# Altium PCB 002-09 -- Hall Effect PCBA.PcbDoc
Units mm, origin at the board's own origin, x right, y up, seen from the top; angles counter-clockwise.
Board outline 43.48 x 43.48 mm, 4 copper layers (Top Layer, VCC, GND, Bottom Layer), stack 1.746 mm thick; 12 components, 6 nets, 37 pads, 25 vias.
Unrouted connection lines stored in the file: 1.
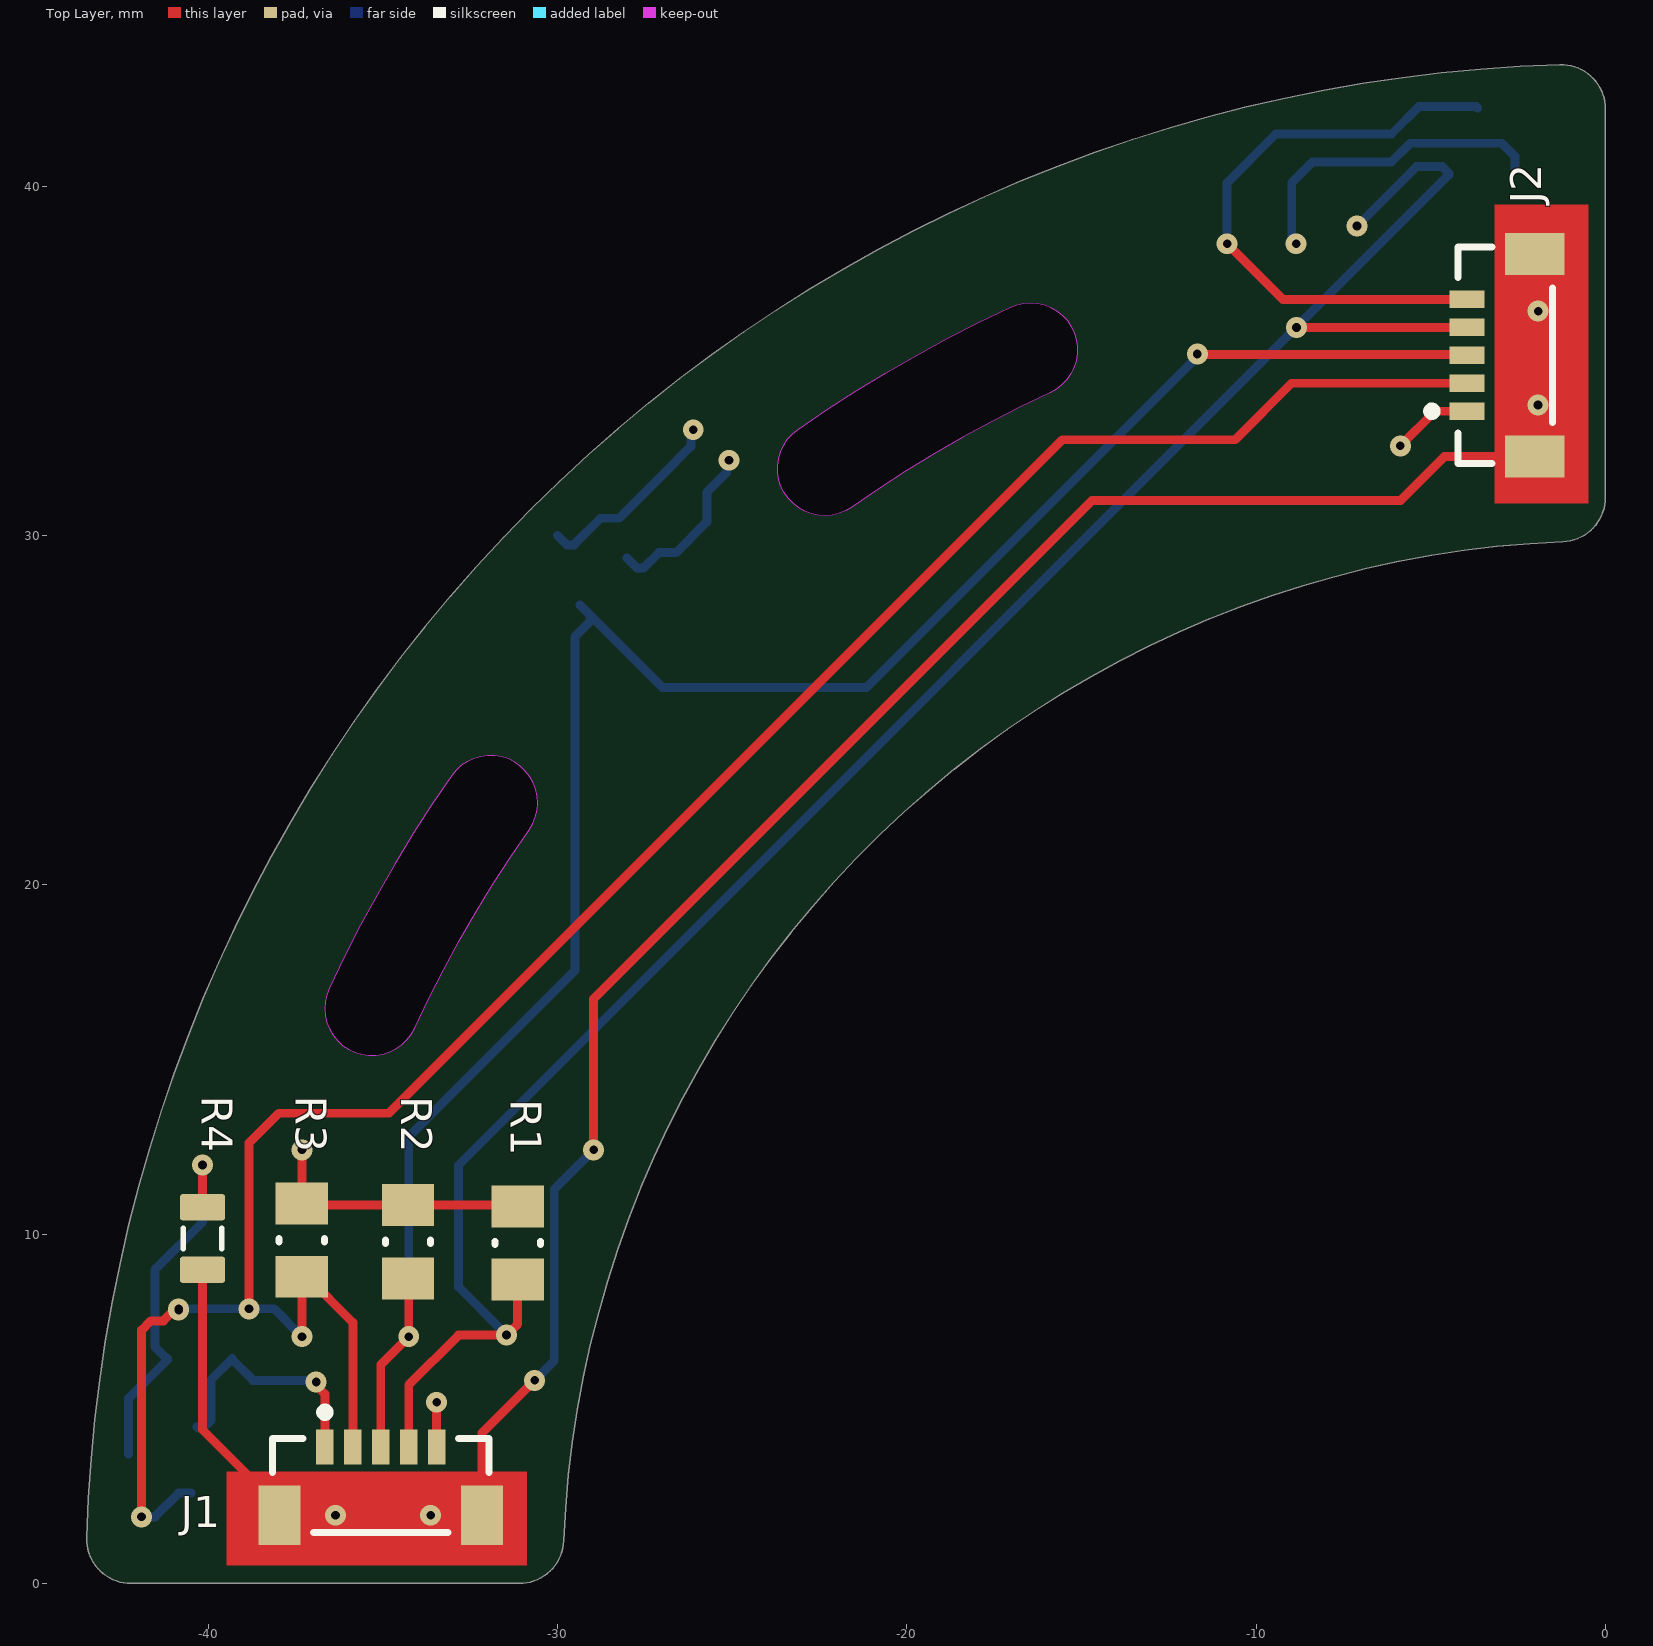
[diagram p0: Top Layer view]
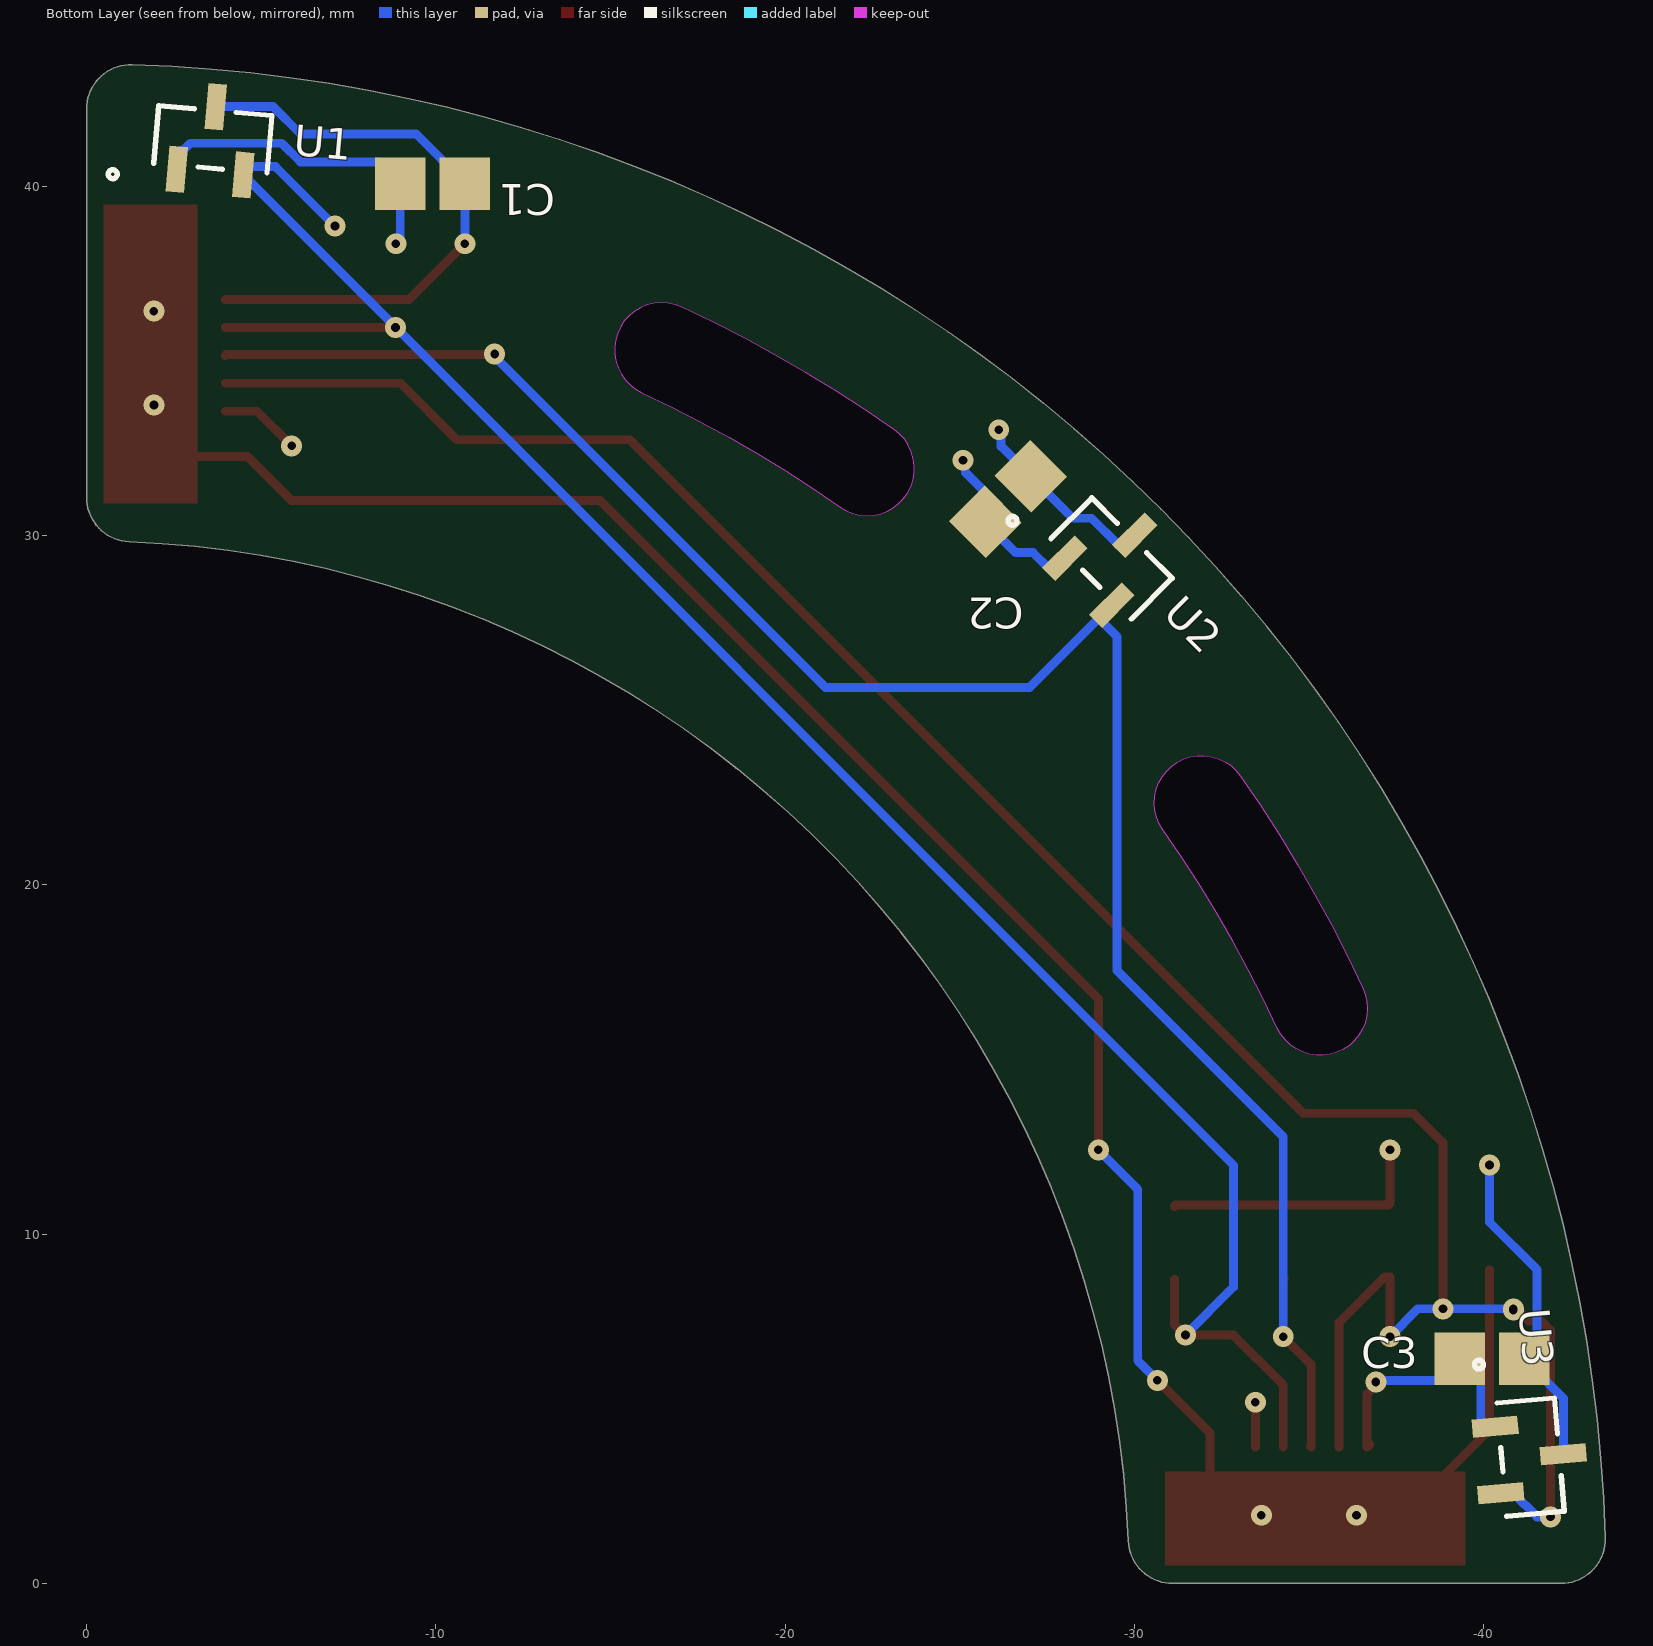
[diagram p1: Bottom Layer view, seen from below]
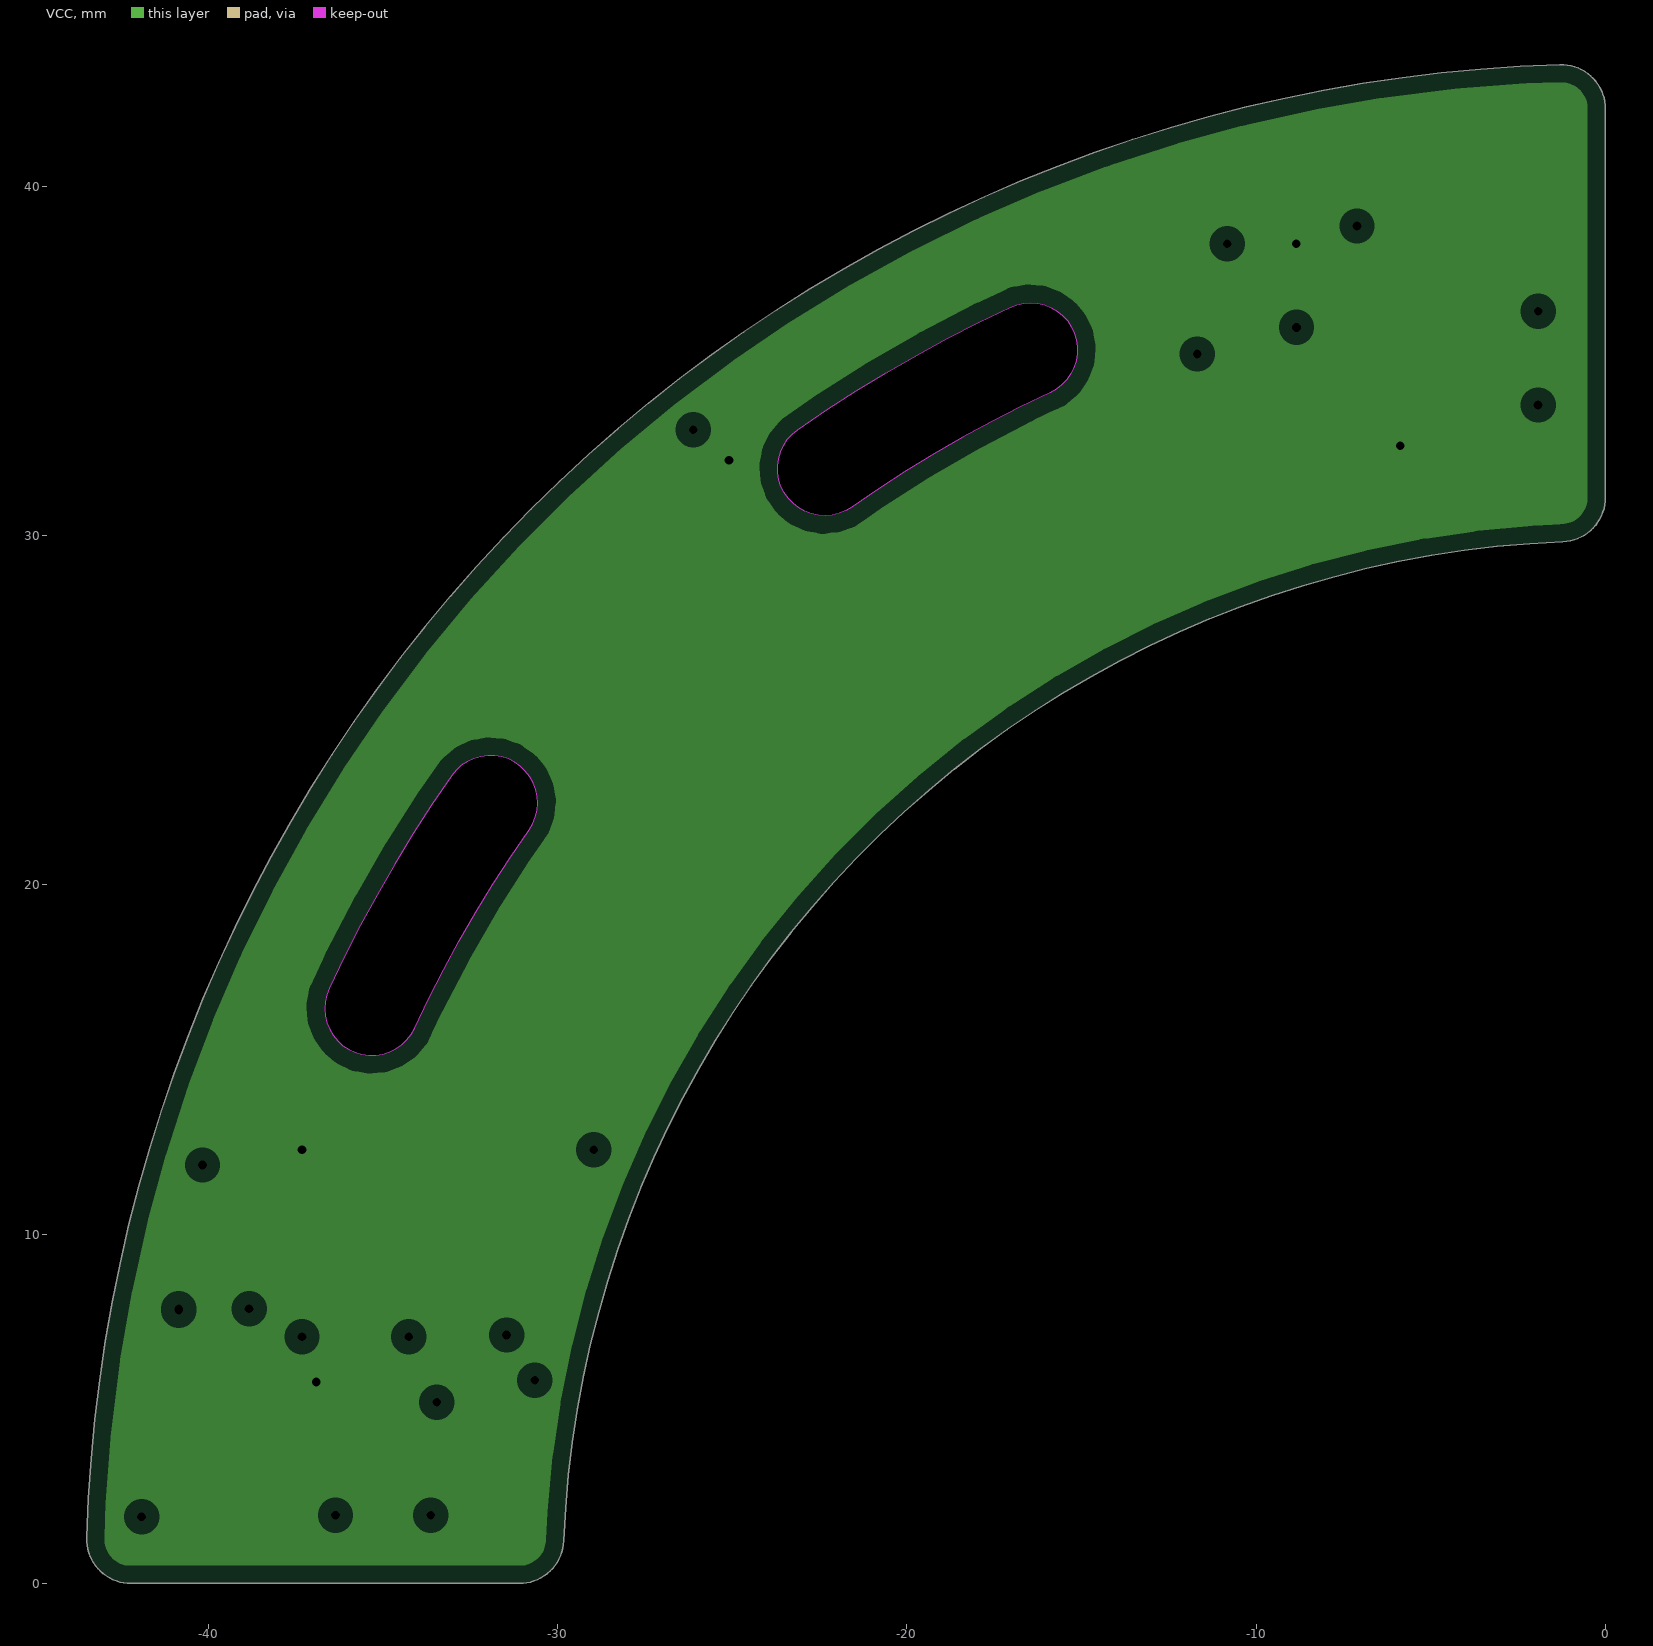
[diagram p2: VCC, clearances drawn from the general rule]
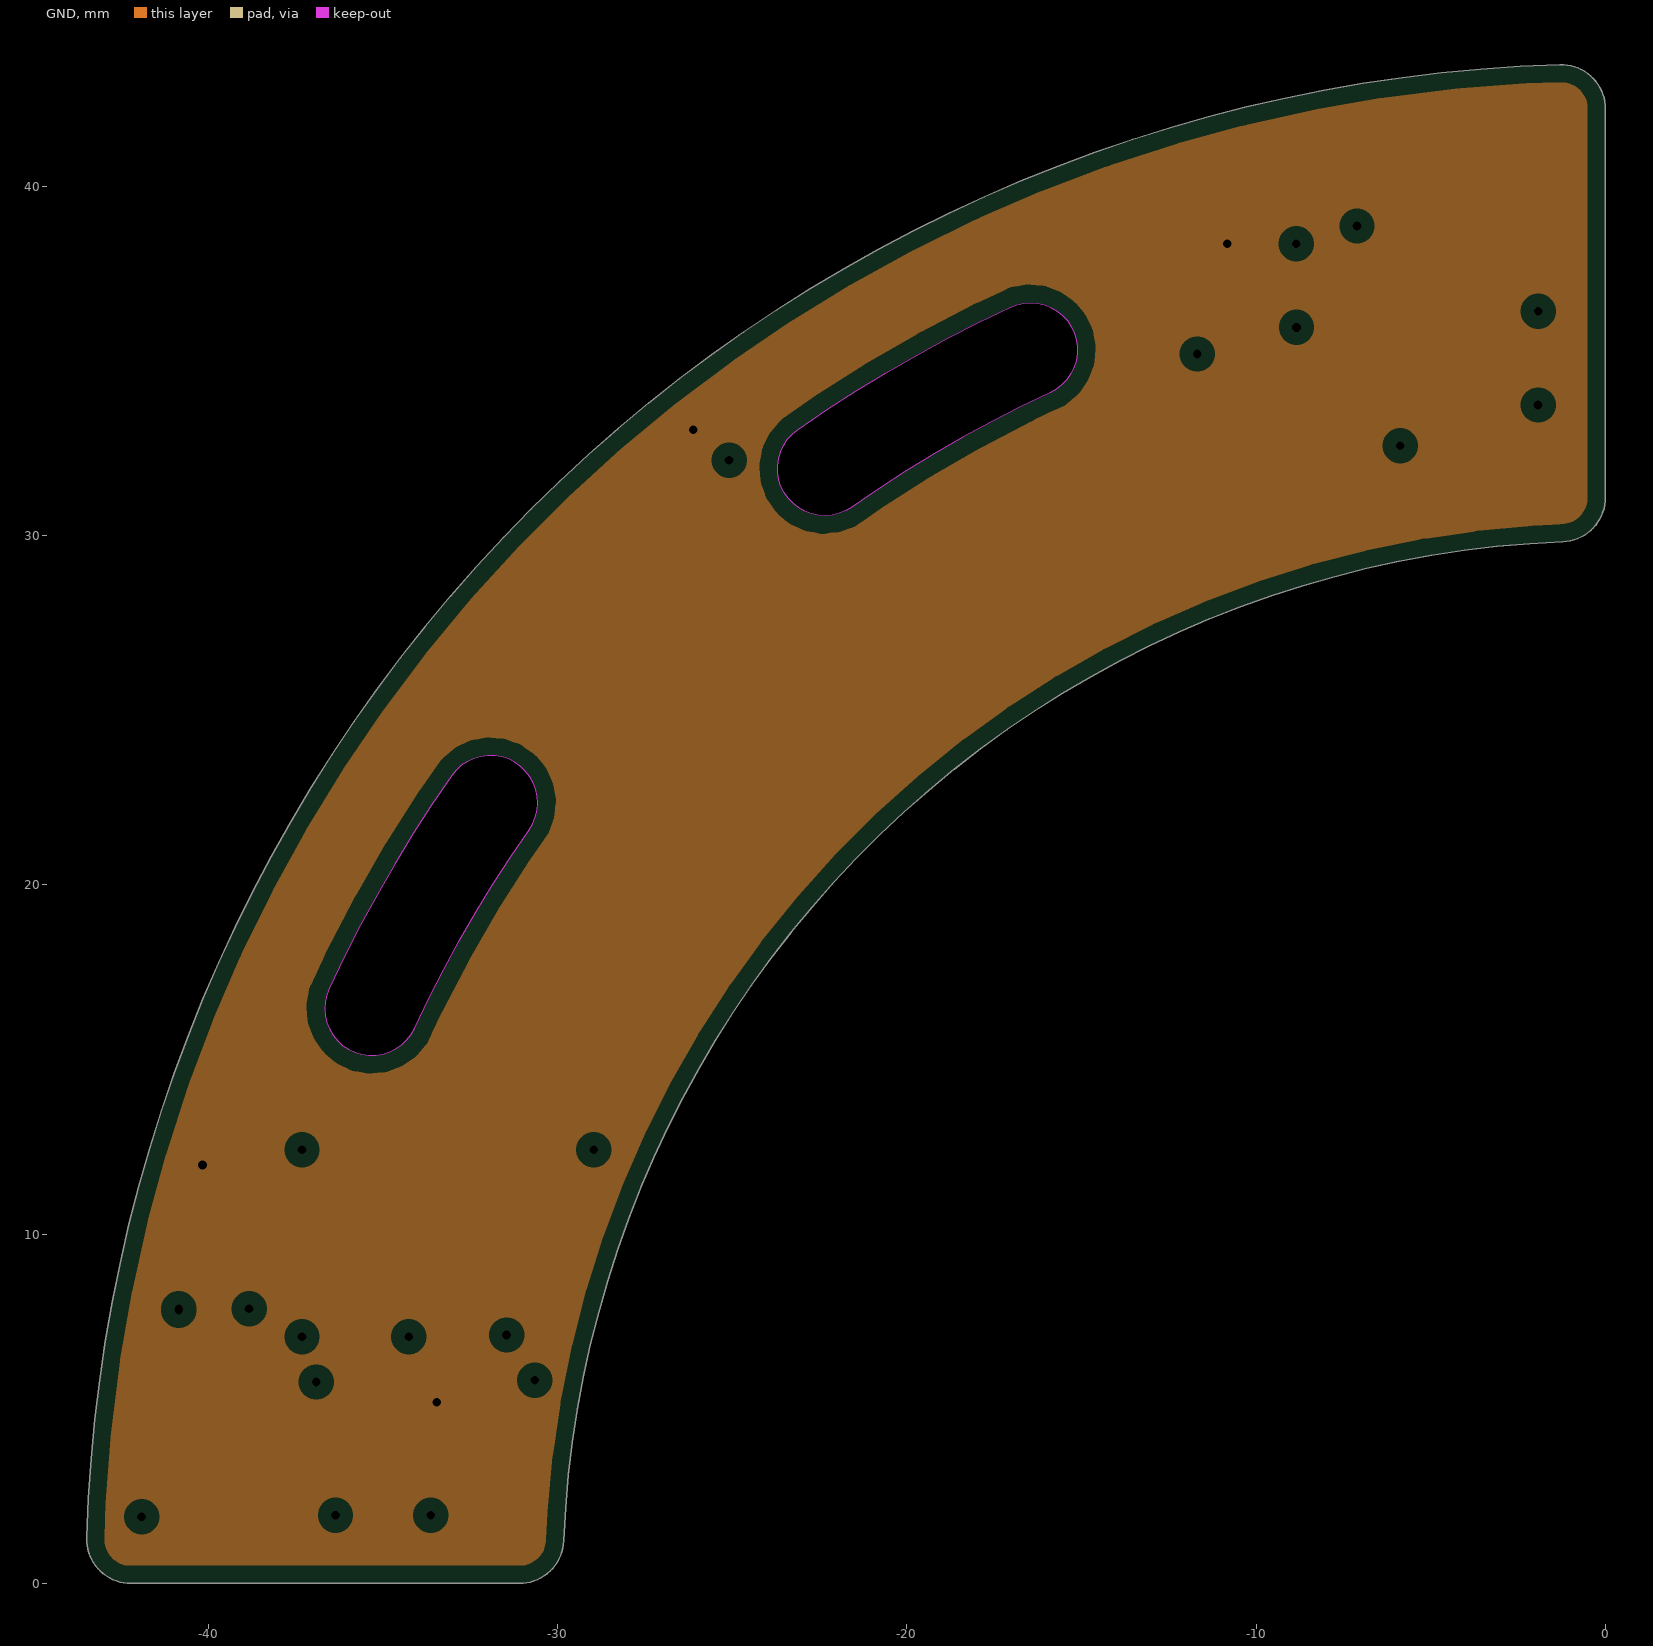
[diagram p3: GND, clearances drawn from the general rule]
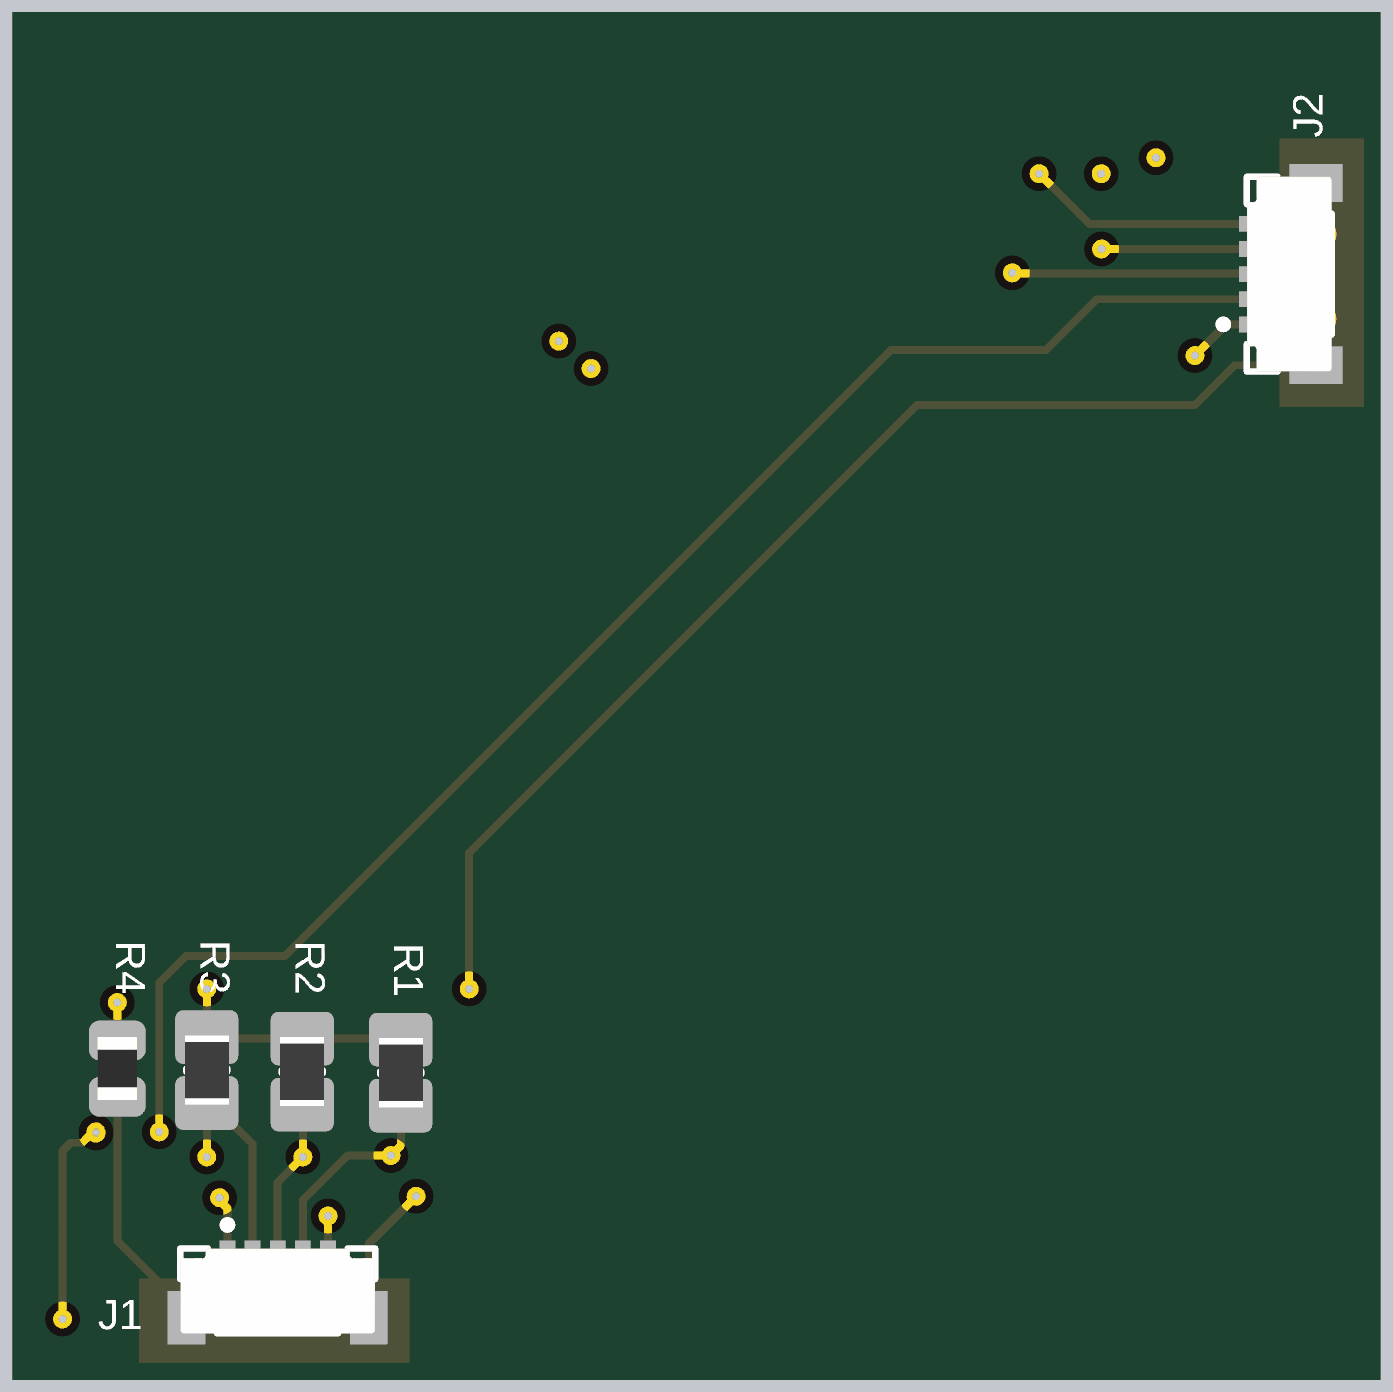
[diagram p4: 3D render of the assembled board from above, using the file's embedded part models]
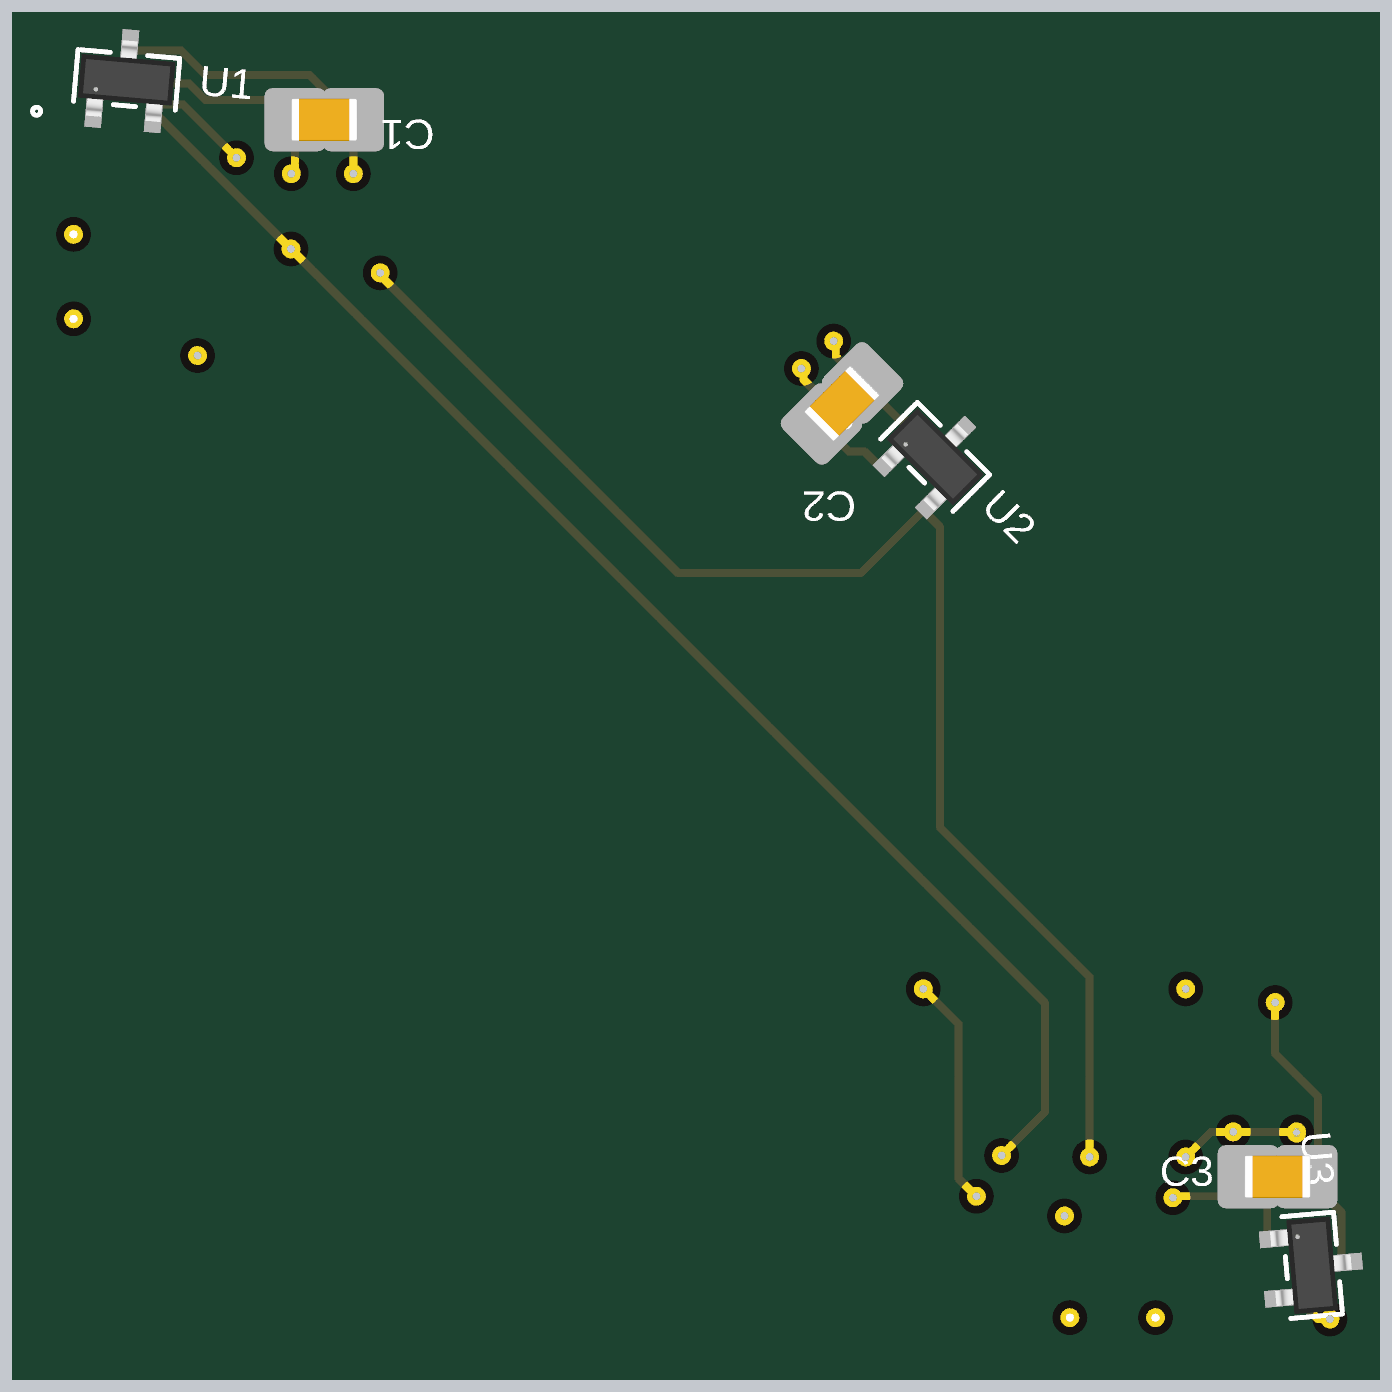
[diagram p5: 3D render of the assembled board from below, using the file's embedded part models]

## Layer stack, top to bottom
Top Solder: solder mask 0.0127, Solder Resist, Dk 3.3
Top Layer: signal copper 0.0178
Dielectric 1: prepreg 0.0711, PP-006, Dk 4.1
VCC: plane copper 0.035, net VCC
Dielectric1: core 1.4986, FR-4, Dk 4.3
GND: plane copper 0.035, net GND
Dielectric 2: prepreg 0.0711, PP-006, Dk 4.1
Bottom Layer: signal copper 0.0178
Bottom Solder: solder mask 0.0127, Solder Resist, Dk 3.3

## Board outline
-42.211,0 -31.094,0 ccw(c-31.094,1.27) -29.825,1.218 cw(c0,0) -1.218,29.825 ccw(c-1.27,31.094) 0,31.094 0,42.211 ccw(c-1.27,42.211) -1.308,43.48 ccw(c0,0) -43.48,1.308 ccw(c-42.211,1.27)
cut-out: -21.575,30.813 cw(c-22.351,31.921) -23.127,33.029 cw(c0,0) -17.04,36.543 cw(c-16.469,35.317) -15.897,34.091 ccw(c0,0)
cut-out: -36.543,17.04 ccw(c-35.317,16.469) -34.091,15.897 cw(c0,0) -30.813,21.575 ccw(c-31.921,22.351) -33.029,23.127 ccw(c0,0)

## Design rules (kind name [scope] priority, off if disabled: settings)
Clearance [All] p1: gap=0.1 ignorepadtopadclearanceinfootprint=FALSE
HoleSize [All] p1: absolutevalues=TRUE maxlimit=7.62 minlimit=0.254 maxpercent=80.000 minpercent=20.000
MinimumAnnularRing [All] p1: minimumring=0.254
PasteMaskExpansion [All] p1: expansion=0.254
PlaneClearance [All] p1: clearance=0.381
PlaneConnect [All] p1: pad.planeconnectstyle=Relief pad.reliefexpansion=0.508 pad.reliefentries=4 pad.reliefconductorwidth=0.254 pad.reliefairgap=0.254 via.planeconnectstyle=Direct via.reliefexpansion=0.508 via.reliefentries=4 via.reliefconductorwidth=0.254 via.reliefairgap=0.254
PolygonConnect [All] p1: connectstyle=Relief reliefconductorwidth=0.254 reliefentries=4 polygonreliefangle="90 Angle" airgapwidth=0.254
RoomDefinition hall_switches [InComponentClass('hall_switches')] p1: confinementstyle=ConfineIn formatcopy=TRUE lockcomponents=FALSE outline -189.975,-113.017 -139.175,-113.017 -139.175,-87.617 -189.975,-87.617
RoutingVias [All] p1: holewidth=0.711 width=1.27 viastyle="Through Hole" minholewidth=0.711 minwidth=1.27 maxholewidth=0.711 maxwidth=1.27
SMDNeckDown [All] p1: percent=100.000
SilkToSolderMaskClearance SilkscreenOverComponentPads [IsPad] p1: minsilkscreentomaskgap=0.254 clearancetoexposedcopper=TRUE
SolderMaskExpansion [All] p1: expansion=0.254 istentingtop=FALSE
Width [All] p1: maxlimit=0.254 minlimit=0.254 preferedwidth=0.254
25 further rules are at their usual default settings.

## Components (designator, comment, footprint, x,y, rotation, side; value= is the part's Value field where it differs from the comment)
C1 "Capacitor 100 nF +/-10% 50 V 0805" CAPC2013X95X50ML10T25 -9.906,40.072 r180 bottom value=100nF
C2 "Capacitor 100 nF +/-10% 50 V 0805" CAPC2013X95X50ML10T25 -26.38,31.044 r135 bottom value=100nF
C3 "Capacitor 100 nF +/-10% 50 V 0805" CAPC2013X95X50ML10T25 -40.239,6.437 r180 bottom value=100nF
J1 "SM05B-SURS-TF(LF)(SN)" FP-SM05B-SURS-TF_LF_SN-MFG -35.06,2.802 r0 top locked
J2 "SM05B-SURS-TF(LF)(SN)" FP-SM05B-SURS-TF_LF_SN-MFG -2.87,35.159 r90 top
R1 "Resistor 10k +/-1% 0805 125 mW" RESC2013X50X35ML15T15 -31.145,9.747 r270 top value=10k
R2 "Resistor 10k +/-1% 0805 125 mW" RESC2013X50X35ML15T15 -34.281,9.78 r270 top value=10k
R3 "Resistor 10k +/-1% 0805 125 mW" RESC2013X50X35ML15T15 -37.318,9.83 r270 top value=10k
R4 "0" RESC0805(2012)_L -40.164,9.88 r90 top
U1 "HAL1502SU-A" SOT-23_TO-236_TDK -3.617,41.342 r185 bottom
U2 "HAL1502SU-A" SOT-23_TO-236_TDK -29.345,29.345 r225 bottom
U3 "HAL1502SU-A" SOT-23_TO-236_TDK -41.342,3.617 r265 bottom

## Footprints (in the part's own frame and the unit in brackets; to place one, negate y for a bottom-side part, rotate by r counter-clockwise, add the part's x,y. Pads: shape width x height; smd on the part's side, far side on the other; paste and mask are expansions set on the pad)
CAPC2013X95X50ML10T25 [mm] "Chip Capacitor, 2-Leads, Body 2.10x1.35mm, IPC Low Density"
  rect 1.45x1.5 smd: 1(-0.925,0) 2(0.925,0)
  body extent -1.05,-0.67 1.05,0.67, height 0.95
FP-SM05B-SURS-TF_LF_SN-MFG [mm]
  rect 0.5x1 smd paste+0 mask+0: 1(-1.6,1.1) 2(-0.8,1.1) 3(0,1.1) 4(0.8,1.1) 5(1.6,1.1)
  rect 1.2x1.7 smd paste+0 mask+0: 6(-2.9,-0.85) 7(2.9,-0.85)
  silkscreen extent -3.1,-1.35 3.1,2.22, body extent -3.6,-1.8 3.6,1.7, height 0.25
RESC0805(2012)_L [mm] "Chip Resistor, Body 2.0x1.3mm, IPC High Density"
  rrect25% 0.76x1.3 smd: 1(-0.9,0) 2(0.89,0)
  silkscreen extent -0.3,-0.55 0.3,0.55, body extent -1,-0.62 1,0.63, height 0.6
RESC2013X50X35ML15T15 [mm] "Chip Resistor, 2-Leads, Body 2.2x1.4mm, IPC Low Density"
  rect 1.2x1.5 smd: 1(-1.05,0) 2(1.05,0)
  silkscreen extent -0.05,-0.65 0.05,0.65, body extent -1.1,-0.7 1.1,0.7, height 0.5
SOT-23_TO-236_TDK [mil]
  rect 21x52 smd paste+0 mask+0: 1(-37.4,-37) 2(37.4,-37) 3(0,37)
  silkscreen extent -114,-54 64,33, body extent -59,-49 59,49, height 43

## Part data
C1 C2 C3: library part CMP-001-00018-4, "Chip Capacitor, 100 nF, +/- 10%, 50 V, 0805 (2012 Metric)", Capacitor Type=Ceramic, Case/Package=0805, Max Operating Temperature=125°C, Min Operating Temperature=-55°C, Tolerance=10%, Voltage Rating=50V, Mounting Technology=SM, Pins=2, RoHS Compliant=True
J1 J2: library part CMP-17439-000553-1, "CONN HEADER SMD R/A 5POS 0.8MM", Case/Package=SMD/SMT, Flammability Rating="UL94 V-0", Insulation Color=Natural, Max Operating Temperature=85°C, Min Operating Temperature=-25°C, Voltage Rating=30V, Connector Type=Header, Contact Finish - Mating=TIN, Contact Material="Copper Alloy", Contact Shape=Rectangular, Contact Type="Outer Shroud Contact", Fastening Type=Pull, Height=1.75mm, Insulation Material=Nylon, Lead Free="Lead Free", Length=6.2mm, Mount="Surface Mount", Number of Poles=5, Number of Positions=5, Number of Rows=1, Packaging="Cut Tape", Pitch=0.8mm, Series=SUR, Termination=Solder, Width=2.7mm
R1 R2: library part CMP-009-00018-5, "Chip Resistor, 10 KOhm, +/- 1%, 125 mW, -55 to 155 degC, 0805 (2012 Metric)", Case/Package=0805, Max Operating Temperature=155°C, Min Operating Temperature=-55°C, Power=125mW, Tolerance=1%, Voltage Rating=150V, Mounting Technology=SM, Pins=2, RoHS Compliant=True
R3: library part RES-2, "Chip Resistor, 10 KOhm, +/- 1%, 125 mW, -55 to 155 degC, 0805 (2012 Metric)", Case/Package=0805, Max Operating Temperature=155°C, Min Operating Temperature=-55°C, Power=125mW, Tolerance=1%, Voltage Rating=150V, Mounting Technology=SM, Pins=2, RoHS Compliant=True
R4: library part CMP-009-00102-1, "0.125W 5% 0805 (2012 Metric)  SMD", Case/Package=0805, Power=125mW, Tolerance=5%, Mounting Technology=SMT, Pins=2
U1 U2 U3: "No Description Available", Mfr_Name=TDK, Copyright="Copyright (C) 2024 Ultra Librarian. All rights reserved.", Manufacturer_Part_Number=HAL1502SU-A, RefDes=RefDes, Type=DEV

## Via types
v1: diameter 0.6, hole 0.25, Top Layer to Bottom Layer, 25 vias

## Nets (pads, with @x,y where several pads share a name; then routed paths per layer and width w, separated by ;. In a path a pad name is that pad's centre, name@x,y a point inside that pad or via, vN(x,y) a via of type N, cw(c..) or ccw(c..) an arc to the next point about the centre after c; other vN are vias at no path point)
CHASSIS: J1.6 J1.7 J2.6 J2.7 R4.1 | length 69
  Top Layer w0.254: R4.1 -40.164,4.406 -37.96,2.202 J1.6 v1(-36.357,1.952) v1(-33.631,1.952) J1.7 -32.16,4.311 v1(-30.656,5.815) ; v1(-28.966,12.413) -28.966,16.74 -14.707,30.999 -5.873,30.999 -4.612,32.259 J2.6 ; J2.7@-1.952,38.023 -1.926,37.997 v1(-1.926,36.425) v1(-1.926,36.425) -1.927,33.738 v1(-1.928,33.736) J2.6@-1.928,32.259
  Bottom Layer w0.254: v1(-30.656,5.815) -30.093,6.378 -30.093,11.287 v1(-28.966,12.413)
GND: C1.2 C2.2 C3.2 J1.5 J2.5 R4.2 U1.3 U2.3 U3.3 | length 34.9
  Top Layer w0.254: R4.2 v1(-40.164,11.98) ; J1.5 v1(-33.46,5.188) ; v1(-10.831,38.354) -9.236,36.759 J2.5
  Bottom Layer w0.254: U3.3 -42.278,5.298 -41.164,6.412 C3.2 ; C3.2@-41.176,6.425 -41.528,6.776 -41.528,8.98 -40.164,10.344 v1(-40.164,11.98) ; U2.3 -29.731,29.731 -29.534,29.731 -28.77,30.494 -28.238,30.494 C2.2 -26.181,32.551 -26.181,32.962 v1(-26.115,33.029) ; v1(-10.831,38.354) C1.2 -10.831,40.097 -9.433,41.495 -6.125,41.495 -5.342,42.278 U1.3 U1.3@-3.665,42.244
H1: J1.4 J2.4 R1.2 U1.2 | length 60.8
  Top Layer w0.254: J1.4 -34.26,5.683 -32.831,7.112 v1(-31.458,7.112) -31.145,7.425 R1.2 ; v1(-8.845,35.959) J2.4
  Bottom Layer w0.254: v1(-31.458,7.112) -32.835,8.489 -32.835,11.969 U1.2 -4.481,40.367 -4.678,40.563 -5.411,40.563 v1(-7.112,38.862)
H2: J1.3 J2.3 R2.2 U2.2 | length 58.4
  Top Layer w0.254: J1.3@-35.043,3.92 J1.3 -35.06,6.267 v1(-34.26,7.067) -34.26,8.709 R2.2 ; v1@-11.66,35.199 v1(-11.684,35.199) -11.664,35.179 -3.99,35.179 J2.3
  Bottom Layer w0.254: v1(-34.26,7.067) -34.26,12.785 -29.505,17.54 -29.505,27.102 -29.074,27.533 U2.2@-29.074,27.73 ; U2.2 U2.2@-29.074,27.73 ; v1(-11.684,35.199) -11.684,35.122 -21.152,25.654 -26.997,25.654 U2.2@-29.074,27.73
H3: J1.2 J2.2 R3.2 U3.2 | length 68.3
  Top Layer w0.254: v1(-41.907,1.907) -41.907,7.253 -41.642,7.518 -41.284,7.518 -40.939,7.864 v1(-40.845,7.864) ; v1(-38.83,7.864) -38.83,12.615 -37.983,13.462 -34.829,13.462 -15.547,32.744 -10.603,32.744 -8.988,34.359 J2.2 ; v1@-37.252,7 v1(-37.318,7.067) R3.2 -37.168,8.78 -35.86,7.472 J1.2
  Bottom Layer w0.254: v1(-41.907,1.907) -41.528,1.907 -40.847,2.589 U3.2 ; v1(-40.845,7.864) v1(-38.83,7.864) -38.115,7.864 v1(-37.318,7.067) v1@-37.384,7
  other v1: -40.845,7.824
VCC: C1.1 C2.1 C3.1 J1.1 J2.1 R1.1 R2.1 R3.1 U1.1 U2.1 U3.1 | length 31.6
  Top Layer w0.254: v1@-37.285,12.446 v1(-37.318,12.413) R3.1 -37.268,10.83 R2.1 -31.178,10.83 R1.1 ; v1@-36.91,5.815 v1(-36.91,5.768) -36.91,5.675 -36.66,5.425 J1.1 J1.1@-36.731,3.973 ; v1(-5.873,32.568) -4.881,33.559 J2.1
  Bottom Layer w0.254: U3.1@-40.289,4.447 U3.1 -40.108,4.481 -39.912,4.678 -39.912,5.839 C3.1 -39.314,6.413 -38.716,5.815 v1@-36.91,5.815 ; U2.1 -27.73,29.074 -27.533,29.074 -27.095,29.512 -26.605,29.512 C2.1 -25.726,31.236 -25.155,31.807 -25.155,32.089 v1(-25.089,32.155) ; v1(-8.856,38.354) -8.856,38.448 -8.981,38.573 C1.1 -8.981,40.097 -8.383,40.695 -6.125,40.695 -5.589,41.231 -2.973,41.231 -2.589,40.847 U1.1

## Polygon pours and split planes (outlines as drawn)
VCC on VCC (split plane): 163 vertices, not listed, extent -42.972,0.51 -0.51,42.972
GND on GND (split plane): 163 vertices, not listed, extent -42.972,0.51 -0.51,42.972

## Other copper
Top Layer:
  rectangle net CHASSIS: -39.478,0.511 -30.875,3.199
  region net CHASSIS: -0.49,30.924 -0.49,39.474 -3.178,39.474 -3.178,30.924

## Silkscreen, mask and mechanical layers (free items; w line width, h text height)
Board:
  lines w0.013: -43.48,1.308 ccw(c-42.211,1.27) -42.211,0 -31.094,0 ccw(c-31.094,1.27) -29.825,1.218 cw(c0,0) -1.218,29.825 ccw(c-1.27,31.094) 0,31.094 0,42.211 ccw(c-1.27,42.211) -1.308,43.48 ccw(c0,0) -43.48,1.308 ; -36.543,17.04 cw(c0,0) -33.029,23.127 cw(c-31.921,22.351) -30.813,21.575 ccw(c0,0) -34.091,15.897 cw(c-35.317,16.469) -36.543,17.04 ; -23.127,33.029 cw(c0,0) -17.04,36.543 cw(c-16.469,35.317) -15.897,34.091 ccw(c0,0) -21.575,30.813 cw(c-22.351,31.921) -23.127,33.029